# Altium PCB L298N_MODULE_2024-03-09.pcbdoc
Units mm, origin at the board's own origin, x right, y up, seen from the top; angles counter-clockwise.
Board outline 70.18 x 73.69 mm, 2 copper layers (Top Layer, Bottom Layer); 1 components, 0 nets, 13 pads, 0 vias.
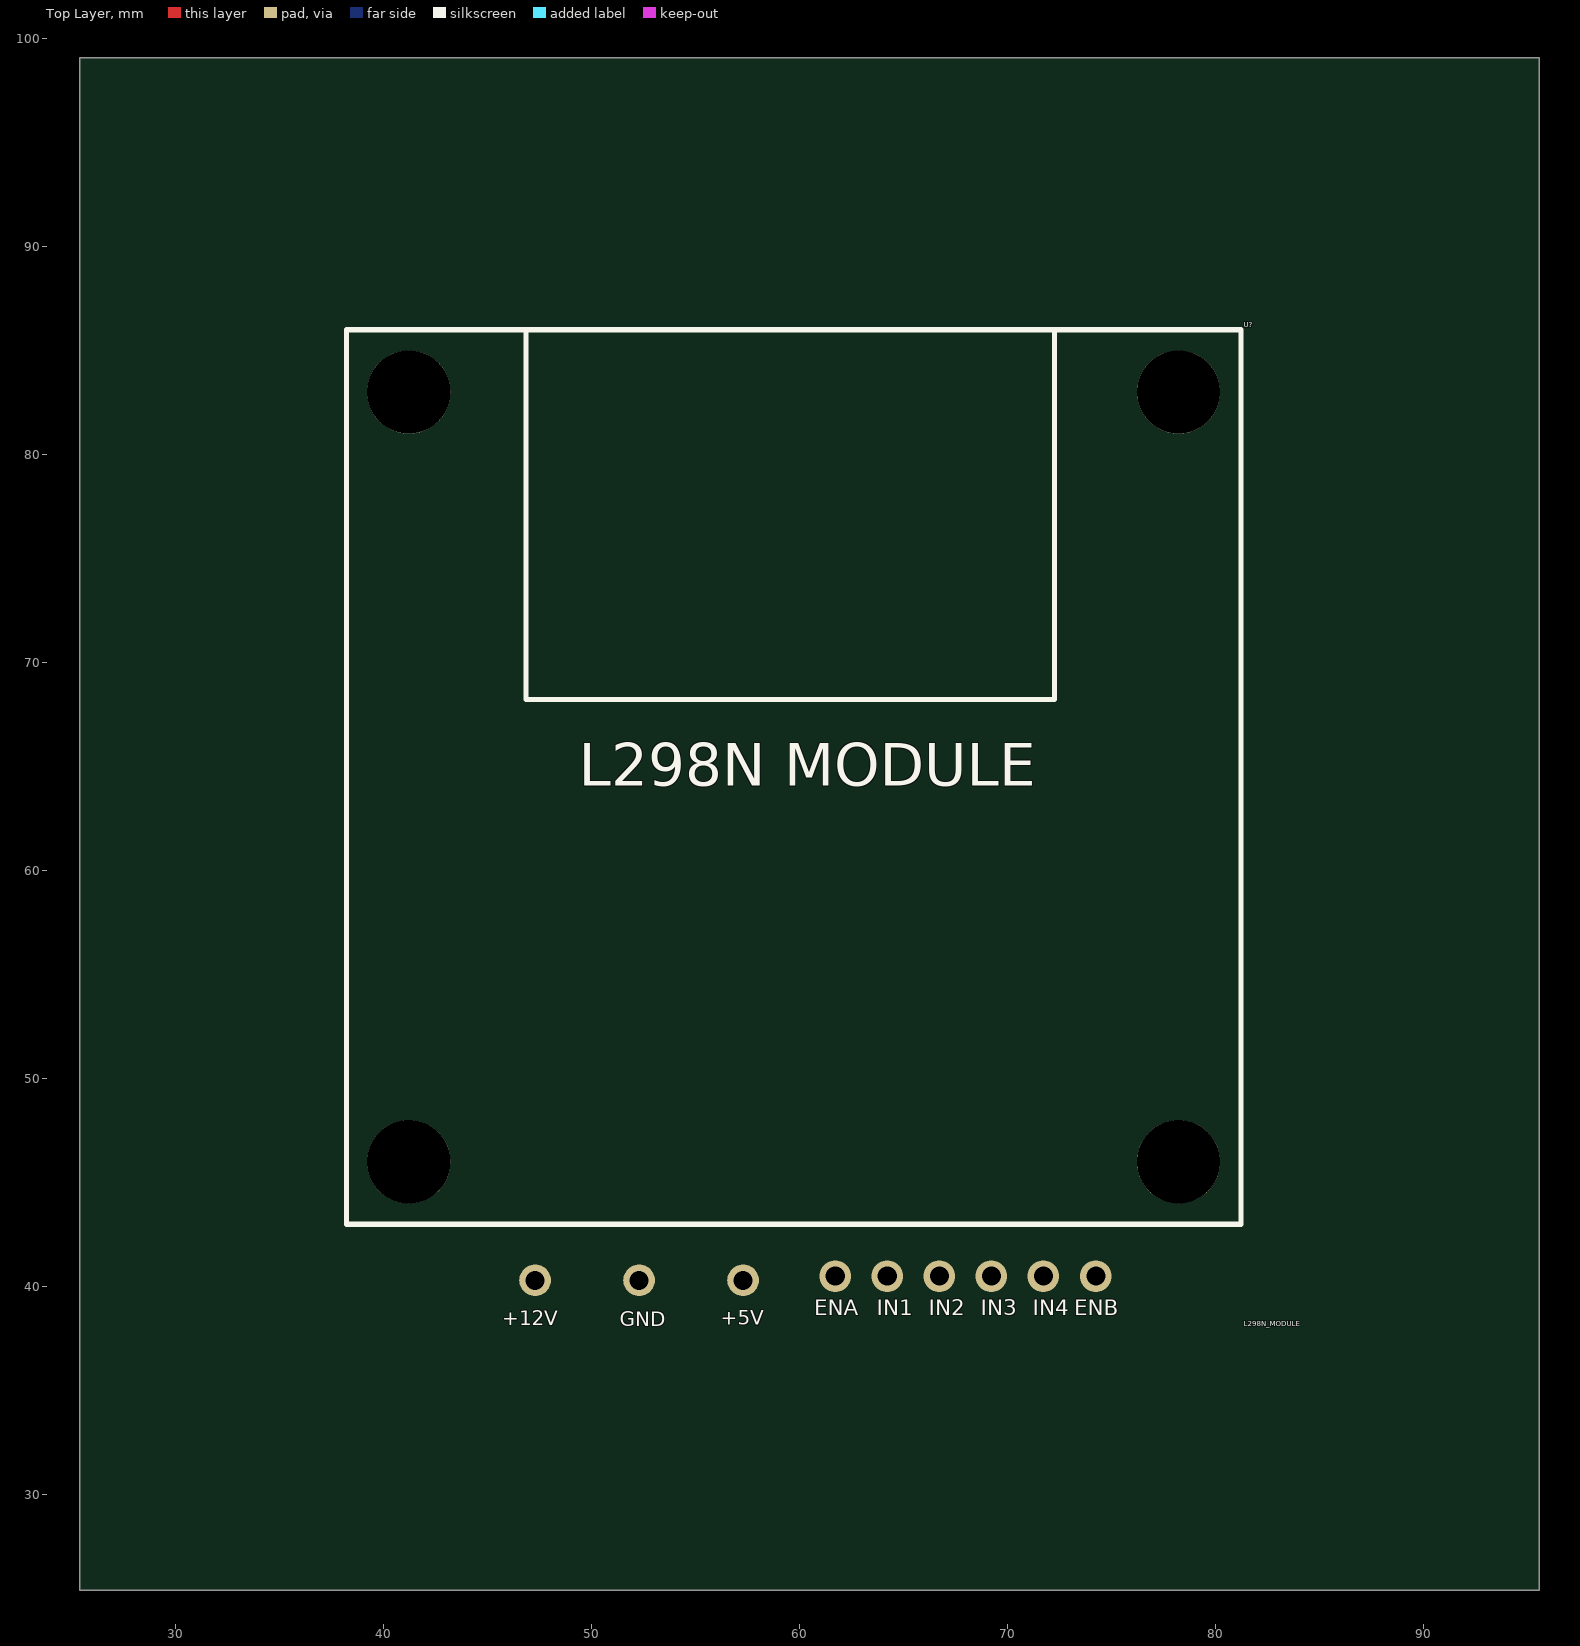
[diagram p0: Top Layer view]
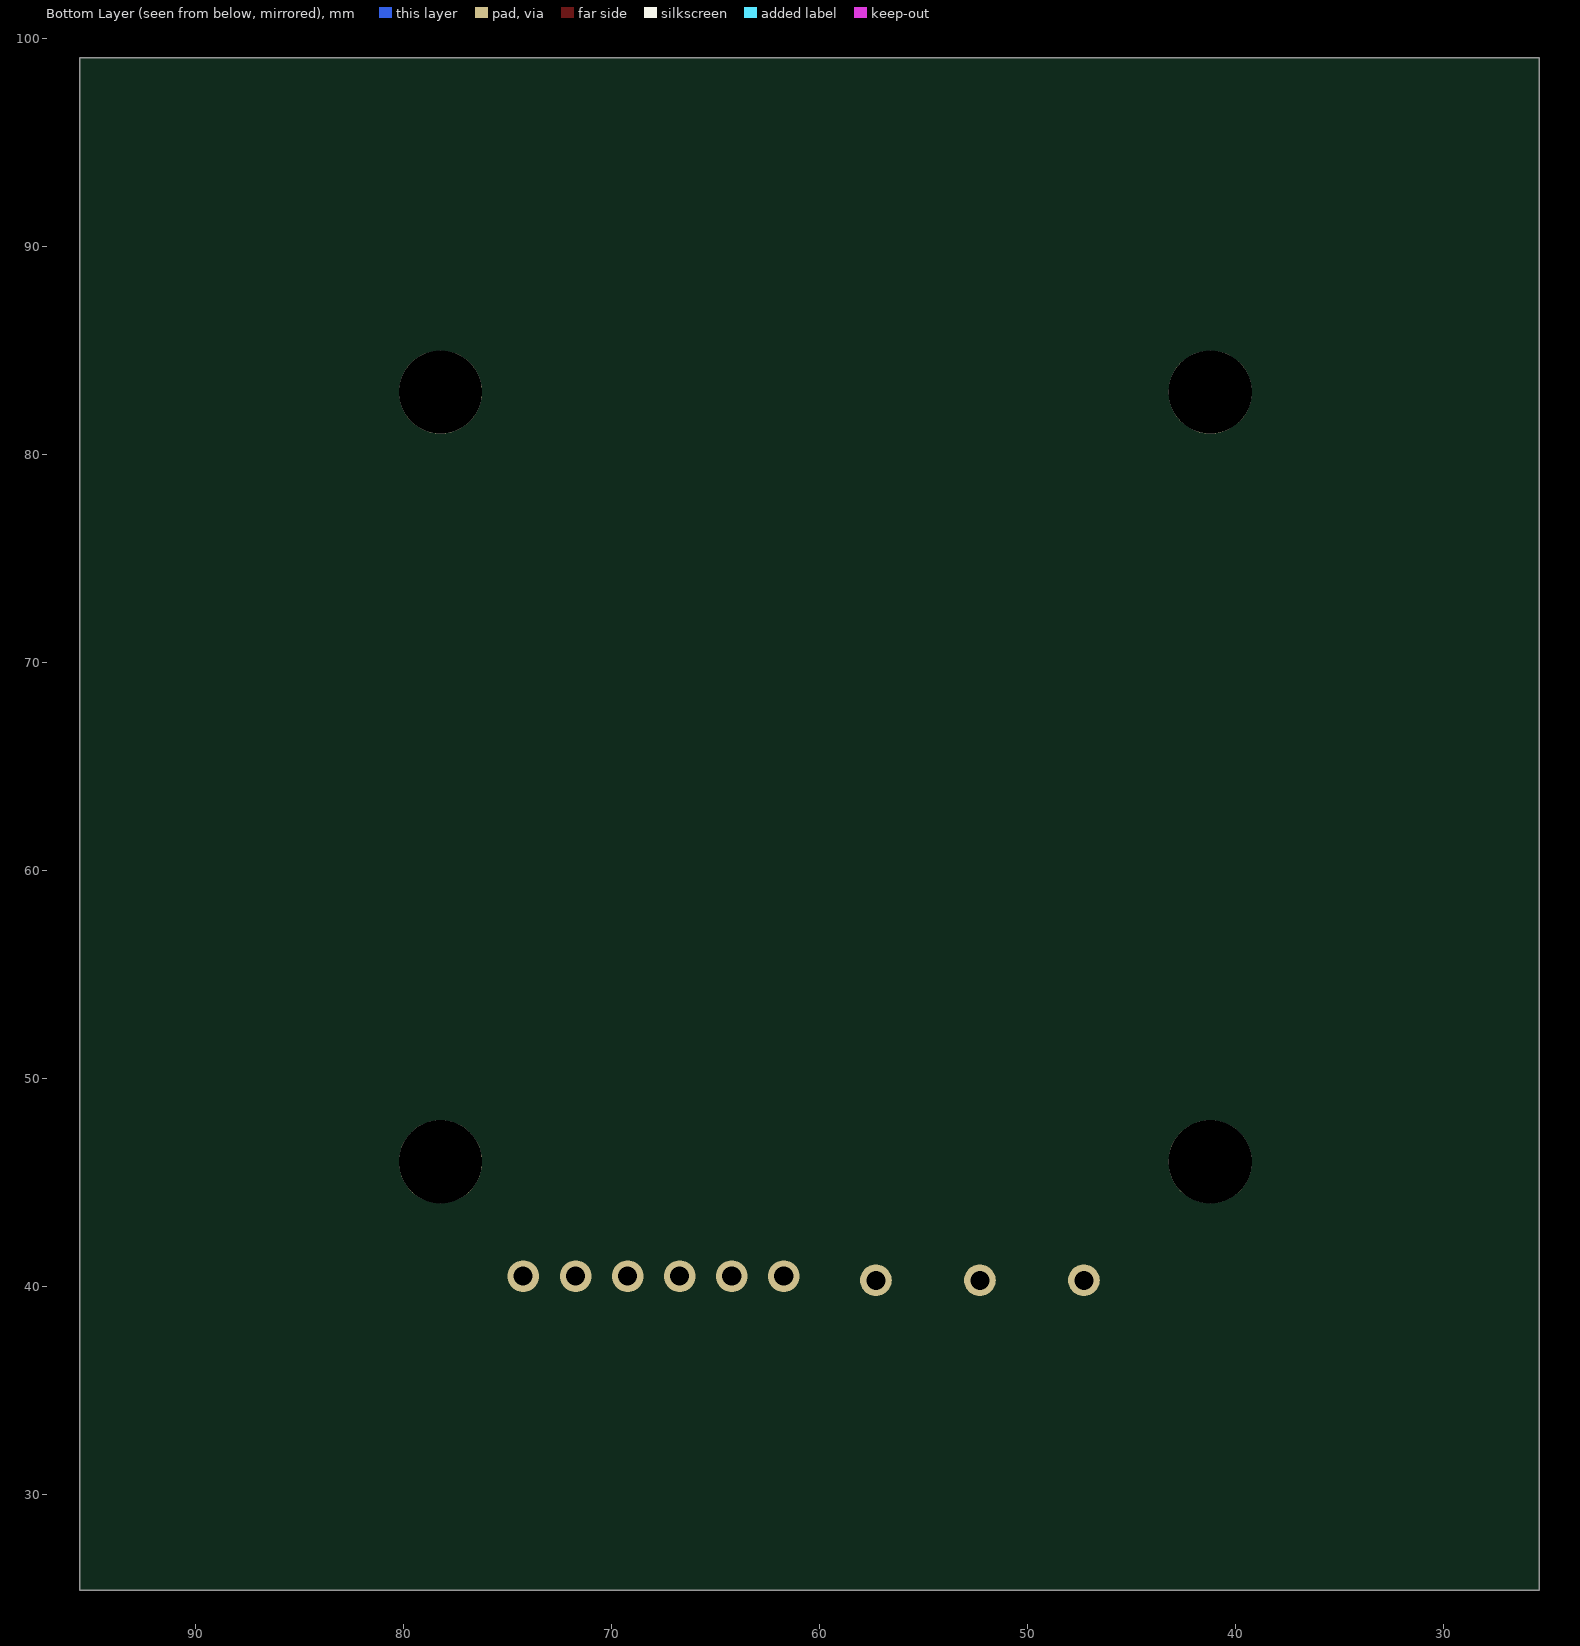
[diagram p1: Bottom Layer view, seen from below]

## Layer stack, top to bottom
Top Layer: signal copper (thickness not stored)
Dielectric: dielectric 0.32, FR-4, Dk 4.8
Bottom Layer: signal copper (thickness not stored)

## Board outline
95.578,25.4 25.4,25.4 25.4,99.087 95.578,99.087

## Components (designator, comment, footprint, x,y, rotation, side; value= is the part's Value field where it differs from the comment)
U? "L298N_MODULE" L298N_MODULE 59.727,62.116 r0 top

## Footprints (in the part's own frame and the unit in brackets; to place one, negate y for a bottom-side part, rotate by r counter-clockwise, add the part's x,y. Pads: shape width x height; smd on the part's side, far side on the other; paste and mask are expansions set on the pad)
L298N_MODULE [mil]
  round 60 hole 36 paste+0 mask+4: 3(-489.43,-858.67) 4(-292.58,-858.67) 5(-95.73,-858.67) 6(78.74,-850.81) 7(177.16,-850.81) 8(275.59,-850.81) 9(374.01,-850.81) 10(472.44,-850.81) 11(571.81,-850.81)
  round 157.48 hole 157.48 unplated paste+0: ""(-728.35,-634.27) ""(-728.35,822.42) ""(728.34,-634.27) ""(728.34,822.42)
  silkscreen extent -846,-752 846,941

## Nets (pads, with @x,y where several pads share a name; then routed paths per layer and width w, separated by ;. In a path a pad name is that pad's centre, name@x,y a point inside that pad or via, vN(x,y) a via of type N, cw(c..) or ccw(c..) an arc to the next point about the centre after c; other vN are vias at no path point)
pads on no net: U?. U?.3 U?.4 U?.5 U?.6 U?.7 U?.8 U?.9 U?.10 U?.11

## Silkscreen, mask and mechanical layers (free items; w line width, h text height)
Document:
  lines w0.003: 60.489,62.243 60.489,62.244

## Text inside footprints (layer, text, board x,y; h text height)
U?: Top Overlay "ENA" at 60.727,38.631 h0.75; Top Overlay "L298N MODULE" at 49.403,64.07 h2.03; Top Overlay "+12V" at 45.727,38.156 h0.7; Top Overlay "GND" at 51.378,38.1 h0.7; Top Overlay "+5V" at 56.227,38.181 h0.7; Top Overlay "IN1" at 63.726,38.63 h0.75; Top Overlay "IN2" at 66.226,38.63 h0.75; Top Overlay "IN3" at 68.727,38.633 h0.75; Top Overlay "IN4" at 71.227,38.63 h0.75; Top Overlay "ENB" at 73.225,38.63 h0.75